# Altium PCB Gagabiro_POC_PSU.PcbDoc
Units mm, origin at the board's own origin, x right, y up, seen from the top; angles counter-clockwise.
Board outline 155 x 95 mm, 2 copper layers (Top Layer, Bottom Layer); 77 components, 30 nets, 159 pads, 0 vias.
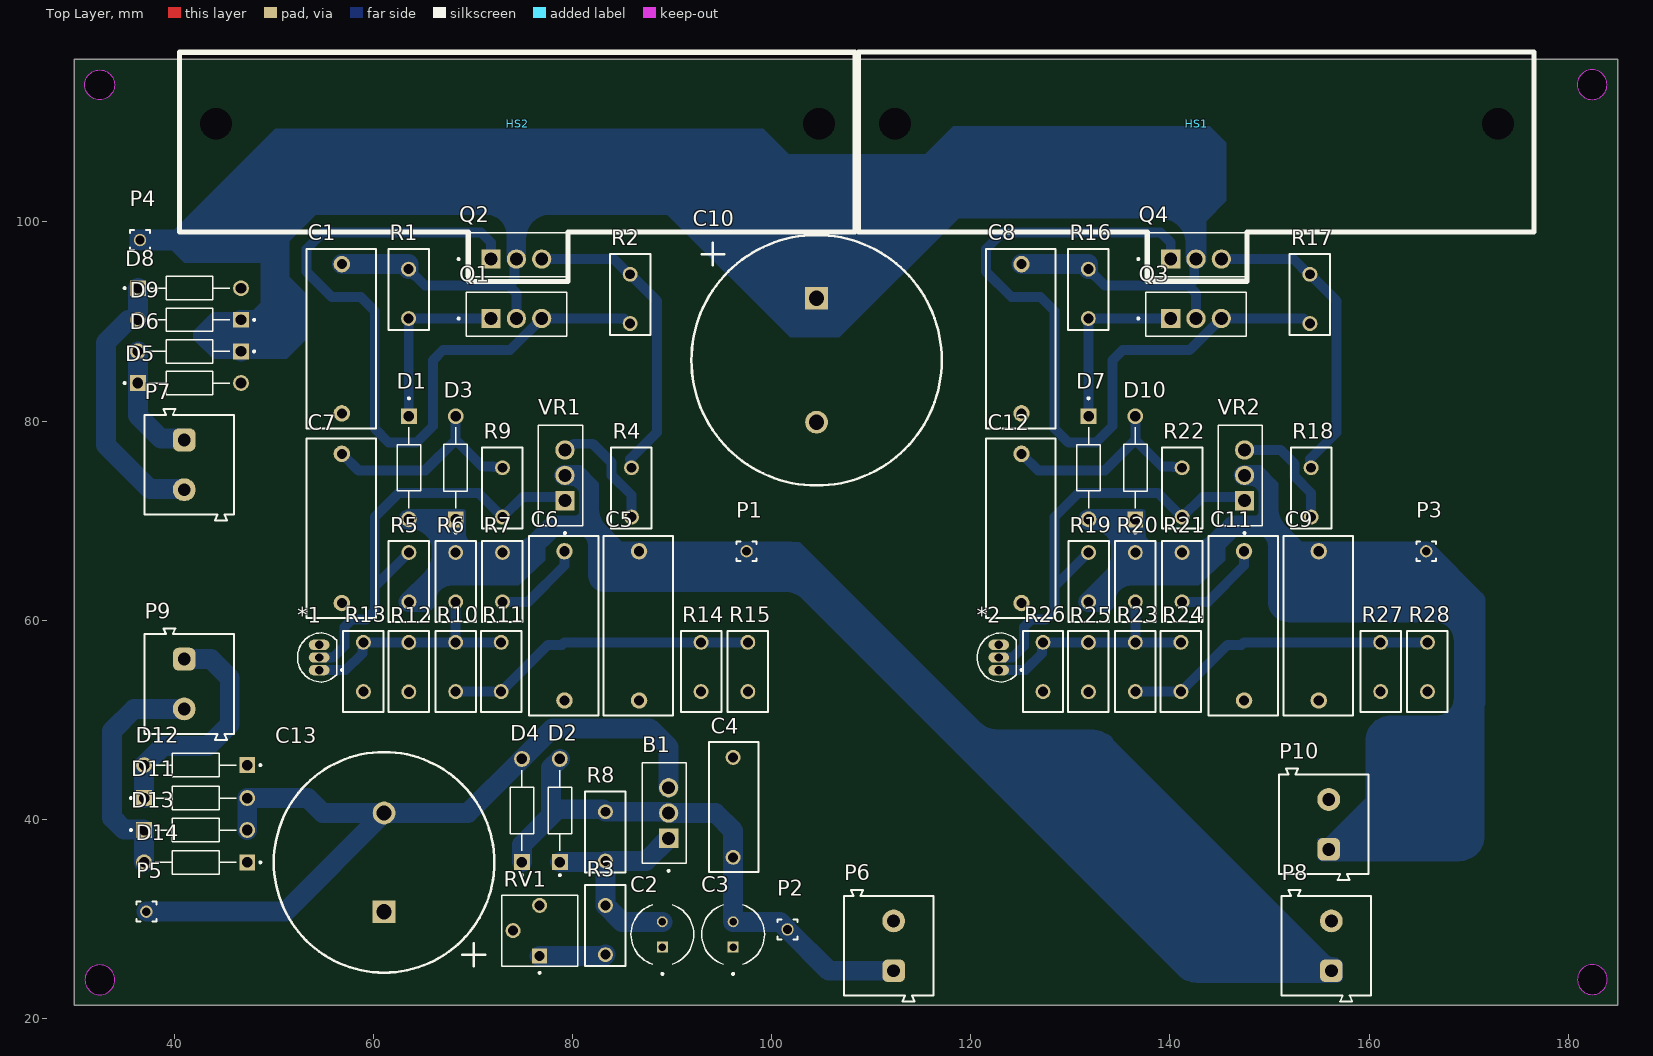
[diagram p0: Top Layer view]
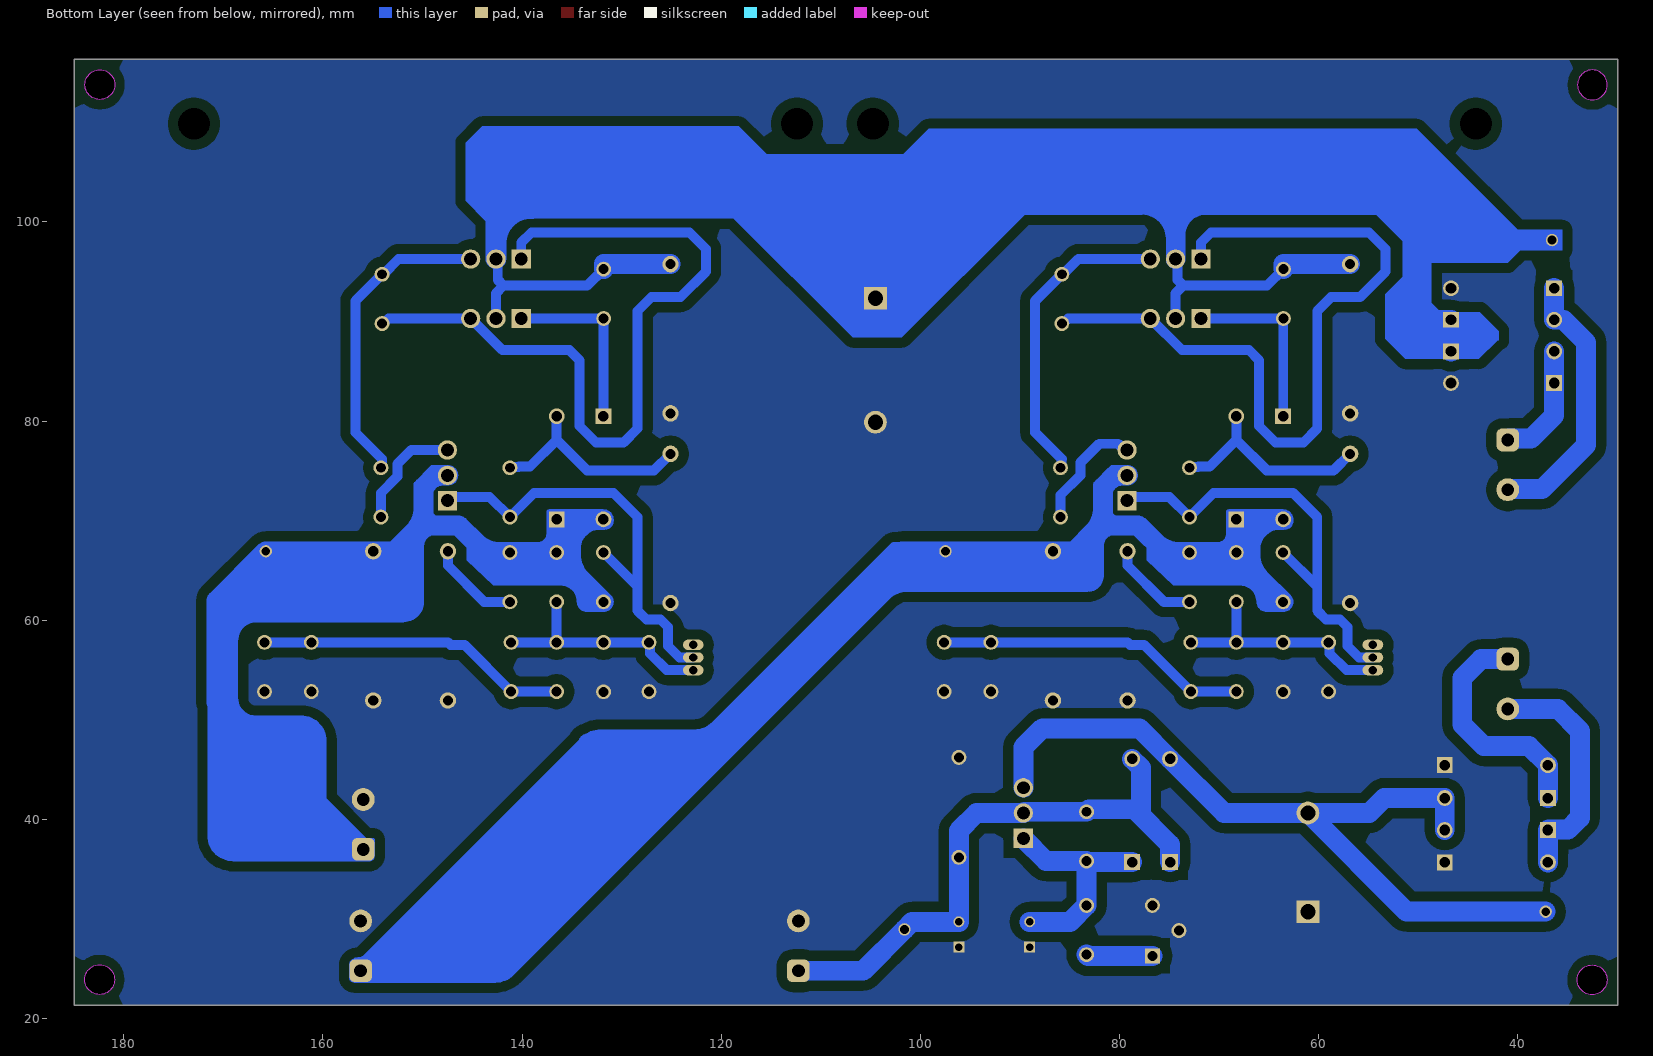
[diagram p1: Bottom Layer view, seen from below]
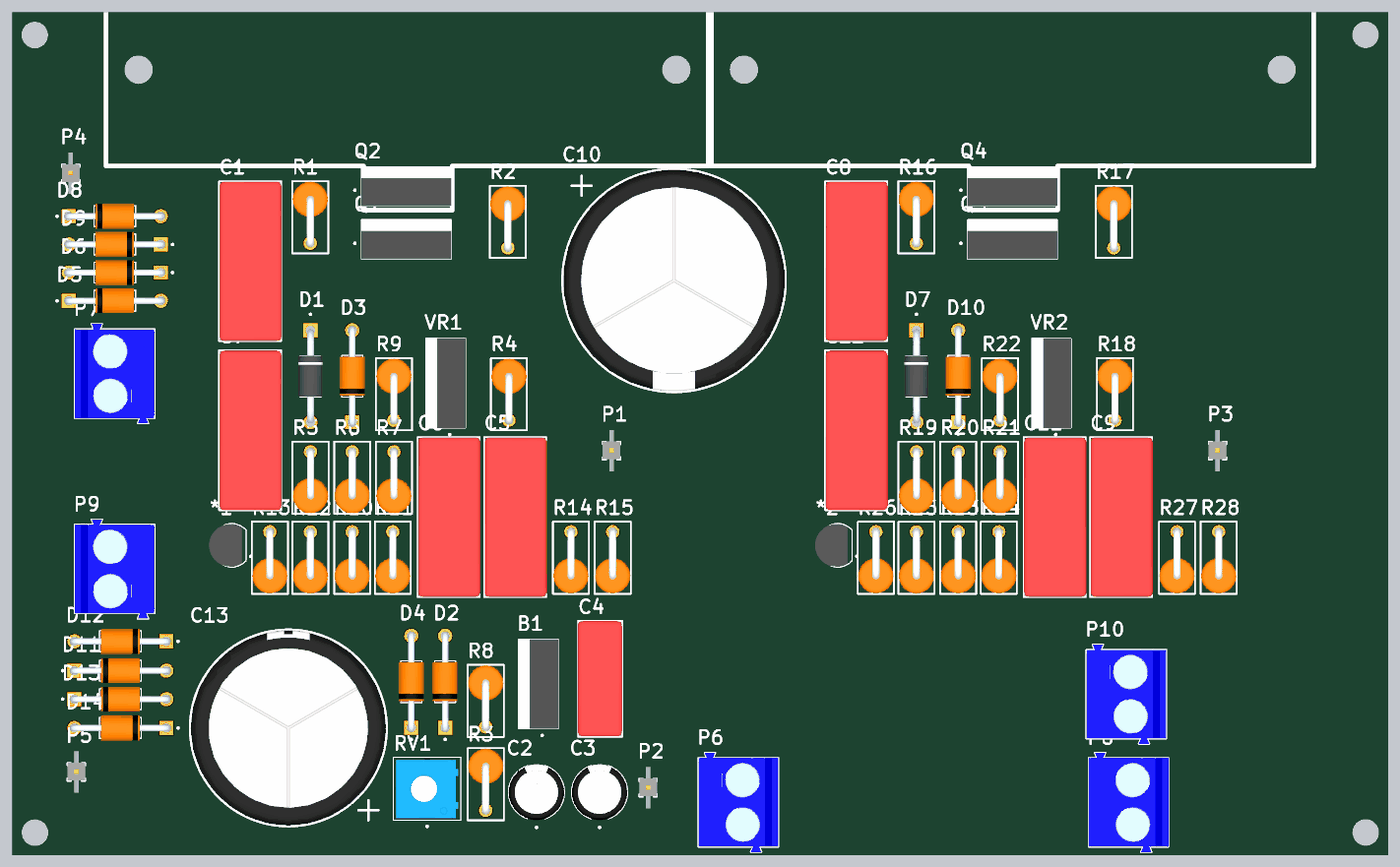
[diagram p2: 3D render of the assembled board from above, using the file's embedded part models]

## Layer stack, top to bottom
Top Solder: solder mask 0.0102, Solder Resist, Dk 3.5
Top Layer: signal copper 0.0356
Dielectric 1: dielectric 0.32, FR-4, Dk 4.8
Bottom Layer: signal copper 0.0356
Bottom Solder: solder mask 0.0102, Solder Resist, Dk 3.5

## Board outline
29.972,21.336 29.972,116.336 184.972,116.336 184.972,21.336
cut-out: 31.052,23.889 ccw(c32.552,23.889) 32.552,22.389 ccw(c32.552,23.889) 34.052,23.889 ccw(c32.552,23.889) 32.552,25.389 ccw(c32.552,23.889)
cut-out: 32.525,112.256 cw(c32.525,113.756) 31.025,113.756 cw(c32.525,113.756) 32.525,115.256 cw(c32.525,113.756) 34.025,113.756 cw(c32.525,113.756)
cut-out: 180.892,113.783 ccw(c182.392,113.783) 182.392,112.283 ccw(c182.392,113.783) 183.892,113.783 ccw(c182.392,113.783) 182.392,115.283 ccw(c182.392,113.783)
cut-out: 180.919,23.916 ccw(c182.419,23.916) 182.419,22.416 ccw(c182.419,23.916) 183.919,23.916 ccw(c182.419,23.916) 182.419,25.416 ccw(c182.419,23.916)

## Design rules (kind name [scope] priority, off if disabled: settings)
AssemblyTestPointUsage [All] p1: isadvanced=TRUE
AssemblyTestpoint [All] p1: isadvanced=TRUE testpointundercomponent=TRUE minsize=1.016 maxsize=2.54 preferedsize=1.524 minholesize=0 maxholesize=1.016 preferedholesize=0.813 testpointgrid=0.025 usegrid=TRUE gridtolerance=0 allowsidetop=TRUE allowsidebottom=TRUE
Clearance Clearance_2 [InNamedPolygon('ground_pour')] p1: isadvanced=TRUE gap=1 ignorepadtopadclearanceinfootprint=FALSE
Clearance Clearance_3 [InNet('Net*1_2') or InNet('Net*1_3') or InNet('Net*2_2') or InNet('Net*2_3')] p2: isadvanced=TRUE gap=0.076 ignorepadtopadclearanceinfootprint=FALSE
Clearance Clearance_1 [InComponent('*') vs InComponent('*')] p3: isadvanced=TRUE gap=0.025 ignorepadtopadclearanceinfootprint=FALSE
Clearance Clearance_1 [OnMid vs OnMid] p4: gap=0.254 ignorepadtopadclearanceinfootprint=FALSE sourcerule=43 cellrowname=All cellrowtype=0 cellcolname=All cellcoltype=0 innerlayers=TRUE
Clearance Clearance_2 [(ExistsOnLayer('Top Layer') Or ExistsOnLayer('Bottom Layer')) vs (ExistsOnLayer('Top Layer') Or ExistsOnLayer('Bottom Layer'))] p5: gap=0.254 ignorepadtopadclearanceinfootprint=FALSE sourcerule=43 cellrowname=All cellrowtype=0 cellcolname=All cellcoltype=0 outerlayers=TRUE
Clearance [All] p6: gap=0.254 ignorepadtopadclearanceinfootprint=FALSE ismatrix=TRUE
ComponentClearance [All] p1: isadvanced=TRUE gap=0.254 collisioncheckmode=3 verticalgap=0.254 showdistances=FALSE
FabricationTestPointUsage [All] p1: isadvanced=TRUE valid=0 allowmultiple=FALSE
FabricationTestpoint [All] p1: isadvanced=TRUE side=3 testpointundercomponent=TRUE minsize=1.016 maxsize=2.54 preferedsize=1.524 minholesize=0 maxholesize=1.016 preferedholesize=0.813 testpointgrid=0.025 allowsidetop=TRUE allowsidebottom=TRUE usegrid=TRUE gridtolerance=0
FanoutControl Fanout_BGA [IsBGA] p1: isadvanced=TRUE bgadir=Out bgaviamode=Centered fanoutstyle=Auto fanoutdirection=Alternating viagrid=0.025 // Fanout_BGA (Default Rule)
FanoutControl Fanout_LCC [IsLCC] p2: isadvanced=TRUE bgadir=Out bgaviamode=Centered fanoutstyle=Auto fanoutdirection=Alternating viagrid=0.025 // Fanout_LCC (Default Rule)
FanoutControl Fanout_SOIC [IsSOIC] p3: isadvanced=TRUE bgadir=Out bgaviamode=Centered fanoutstyle=Auto fanoutdirection=Alternating viagrid=0.025 // Fanout_SOIC (Default Rule)
FanoutControl Fanout_Small [(CompPinCount < 5)] p4: isadvanced=TRUE bgadir=Out bgaviamode=Centered fanoutstyle=Auto fanoutdirection=OutThenIn viagrid=0.025 // Fanout_Small (Default Rule)
FanoutControl Fanout_Default [All] p5: isadvanced=TRUE bgadir=Out bgaviamode=Centered fanoutstyle=Auto fanoutdirection=Alternating viagrid=0.025 // Fanout_Default (Default Rule)
Height [All] p1: isadvanced=TRUE minheight=0 maxheight=2540 prefheight=12.7
HoleSize [All] p1: isadvanced=TRUE absolutevalues=TRUE maxlimit=25.4 minlimit=0.025 maxpercent=80.000 minpercent=20.000
HoleToHoleClearance [All] p1: isadvanced=TRUE gap=0.254 allowstackedmicrovias=TRUE
LayerPairs [All] p1: isadvanced=TRUE enforce=TRUE
MinimumSolderMaskSliver [All] p1: isadvanced=TRUE minsoldermaskwidth=0.254
NetAntennae [All] p1: isadvanced=TRUE netantennaetolerance=0
PasteMaskExpansion [All] p1: isadvanced=TRUE expansion=0
PlaneClearance [All] p1: isadvanced=TRUE clearance=0.508
PlaneConnect [All] p1: isadvanced=TRUE planeconnectstyle=Relief reliefexpansion=0.508 reliefentries=4 reliefconductorwidth=0.254 reliefairgap=0.254
PolygonConnect [All] p1: connectstyle=Direct reliefconductorwidth=0.254 reliefentries=4 polygonreliefangle="90 Angle" airgapwidth=0.254
RoomDefinition maida_2 [InComponentClass('maida_2')] p1: isadvanced=TRUE confinementstyle=ConfineIn formatcopy=TRUE lockcomponents=FALSE outline 117.983,48.895 170.053,48.895 170.053,101.092 117.983,101.092
RoomDefinition maida_1 [InComponentClass('maida_1')] p2: isadvanced=TRUE confinementstyle=ConfineIn formatcopy=TRUE lockcomponents=FALSE outline 49.736,48.895 101.806,48.895 101.806,101.092 49.736,101.092
RoutingCorners [All] p1: isadvanced=TRUE cornerstyle=45-Degree minsetback=2.54 maxsetback=2.54
RoutingPriority [All] p1: isadvanced=TRUE routingpriority=0
RoutingVias [All] p1: holewidth=0.711 width=1.27 viastyle="Through Hole" minholewidth=0.711 minwidth=1.27 maxholewidth=0.711 maxwidth=1.27
ShortCircuit [All] p1: isadvanced=TRUE allowed=FALSE
SilkToSilkClearance [All] p1: isadvanced=TRUE silktosilkclearance=0.254
SilkToSolderMaskClearance [IsPad] p1: isadvanced=TRUE minsilkscreentomaskgap=0.254 clearancetoexposedcopper=TRUE
SolderMaskExpansion [All] p1: isadvanced=TRUE expansion=0.102 istentingtop=FALSE
SupplyNets "Schematic Supply Nets" [InNet('GND')] p1: isadvanced=TRUE voltage=0.000
UnRoutedNet [All] p1: isadvanced=TRUE
UnpouredPolygon [All] p1: isadvanced=TRUE
Width MaxMinWidth_1 [All] p1: isadvanced=TRUE maxlimit=2 minlimit=1 preferedwidth=1 minimp=50.000000 maximp=50.000000 favimp=50.000000
Width [All] p2: maxlimit=0.254 minlimit=0.254 preferedwidth=0.254
4 further rules are at their usual default settings.

## Classes and differential pairs
component class maida_1: *1 C1 C5 C6 C7 D1 D3 P1 Q1 Q2 R1 R2 R4 R5 R6 R7 R9 R10 R11 R12 R13 R14 R15 VR1
component class maida_2: *2 C8 C9 C11 C12 D7 D10 P3 Q3 Q4 R16 R17 R18 R19 R20 R21 R22 R23 R24 R25 R26 R27 R28

## Components (designator, comment, footprint, x,y, rotation, side; value= is the part's Value field where it differs from the comment)
*1 "LM329" TO92127P495H495-3 54.562,56.261 r270 top
*2 "LM329" TO92127P495H495-3 122.809,56.261 r270 top
B1 "LM337KVURG3" lm317 89.662,40.64 r90 top
C1 "1uF" CAP_panassonic_1u_450V 56.848,80.772 r90 top
C2 "CAP_EL_47u_stand" CAPPRD500W50D630H1120_stand 89.027,28.448 r90 top value=47uF
C3 "CAP_EL_47u_stand" CAPPRD500W50D630H1120_stand 96.139,28.448 r90 top value=47uF
C4 "100nF" CAP_panassonic_100n_450V 96.139,36.195 r90 top
C5 "1uF" CAP_panassonic_1u_450V 86.693,51.943 r90 top
C6 "1uF" CAP_panassonic_1u_450V 79.2,51.943 r90 top
C7 "1uF" CAP_panassonic_1u_450V 56.848,61.722 r90 top
C8 "1uF" CAP_panassonic_1u_450V 125.095,80.772 r90 top
C9 "1uF" CAP_panassonic_1u_450V 154.94,51.943 r90 top
C10 "CAP_EL_220u_450V" CAPPRD500W50D630H1120_stand_25x50 104.521,86.106 r270 top value=220uF
C11 "1uF" CAP_panassonic_1u_450V 147.447,51.943 r90 top
C12 "1uF" CAP_panassonic_1u_450V 125.095,61.722 r90 top
C13 "CAP_EL_2200u_stand" CAPPRD500W50D630H1120_stand_22x40 61.087,35.687 r90 top value=2200uF
D1 "1N4735A" DIOAD1036W78L463D272 63.579,75.311 r270 top
D2 "1N4001G" DIOAD1036W78L470D235 78.74,40.894 r90 top
D3 "1N4001G" DIOAD1036W78L470D235 68.278,75.311 r90 top
D4 "1N4001G" DIOAD1036W78L470D235 74.93,40.894 r90 top
D5 "1N4001G" DIOAD1036W78L470D235 41.541,83.82 r0 top
D6 "1N4001G" DIOAD1036W78L470D235 41.541,86.995 r180 top
D7 "1N4735A" DIOAD1036W78L463D272 131.826,75.311 r270 top
D8 "1N4001G" DIOAD1036W78L470D235 41.541,93.345 r0 top
D9 "1N4001G" DIOAD1036W78L470D235 41.541,90.17 r180 top
D10 "1N4001G" DIOAD1036W78L470D235 136.525,75.311 r90 top
D11 "1N4001G" DIOAD1036W78L470D235 42.164,42.145 r0 top
D12 "1N4001G" DIOAD1036W78L470D235 42.164,45.453 r180 top
D13 "1N4001G" DIOAD1036W78L470D235 42.164,38.934 r0 top
D14 "1N4001G" DIOAD1036W78L470D235 42.164,35.687 r180 top
HS1 "Heatsink" heatsink_HS_6835 108.735,99.005 r0 top
HS2 "Heatsink" heatsink_HS_6835 40.561,99.001 r0 top
P1 "1_con_header" SAMTEC_MTMM-101-X-X-S-X 97.488,66.929 r0 top
P2 "1_con_header" SAMTEC_MTMM-101-X-X-S-X 101.6,28.956 r0 top
P3 "1_con_header" SAMTEC_MTMM-101-X-X-S-X 165.735,66.929 r0 top
P4 "1_con_header" SAMTEC_MTMM-101-X-X-S-X 36.576,98.171 r0 top
P5 "1_con_header" SAMTEC_MTMM-101-X-X-S-X 37.211,30.734 r0 top
P6 "2_conn_borne" 691101710002 111.76,27.305 r90 top
P7 "2_conn_borne" 691101710002 41.521,75.605 r270 top
P8 "2_conn_borne" 691101710002 155.702,27.305 r90 top
P9 "2_conn_borne" 691101710002 41.521,53.594 r270 top
P10 "2_conn_borne" 691101710002 155.448,39.497 r90 top
Q1 "TIP50" TO254P1009X445X1985-3 74.374,90.297 r0 top
Q2 "TIP50" TO254P1009X445X1985-3 74.374,96.266 r0 top
Q3 "TIP50" TO254P1009X445X1985-3 142.621,90.297 r0 top
Q4 "TIP50" TO254P1009X445X1985-3 142.621,96.266 r0 top
R1 "100K" RES_2W_vertical 63.555,95.25 r270 top
R2 "1k" RES_2W_vertical 85.804,94.742 r270 top
R3 "1K5" RES_2W_vertical 83.312,31.369 r270 top
R4 "10R" RES_2W_vertical 85.931,75.311 r270 top
R5 "1K5" RES_2W_vertical 63.579,61.849 r90 top
R6 "1k" RES_2W_vertical 68.278,61.849 r90 top
R7 "2R7" RES_2W_vertical 72.977,61.849 r90 top
R8 "150R" RES_2W_vertical 83.312,40.767 r270 top
R9 "100R" RES_2W_vertical 72.977,75.311 r270 top
R10 "36K" RES_2W_vertical 68.278,52.832 r90 top
R11 "36K" RES_2W_vertical 72.85,52.832 r90 top
R12 "NC" RES_2W_vertical 63.571,52.816 r90 top
R13 "NC" RES_2W_vertical 59.007,52.832 r90 top
R14 "36K" RES_2W_vertical 92.916,52.832 r90 top
R15 "36K" RES_2W_vertical 97.615,52.832 r90 top
R16 "100K" RES_2W_vertical 131.802,95.25 r270 top
R17 "1k" RES_2W_vertical 154.051,94.742 r270 top
R18 "10R" RES_2W_vertical 154.178,75.311 r270 top
R19 "1K5" RES_2W_vertical 131.826,61.849 r90 top
R20 "1k" RES_2W_vertical 136.525,61.849 r90 top
R21 "2R7" RES_2W_vertical 141.224,61.849 r90 top
R22 "100R" RES_2W_vertical 141.224,75.311 r270 top
R23 "36K" RES_2W_vertical 136.525,52.832 r90 top
R24 "36K" RES_2W_vertical 141.097,52.832 r90 top
R25 "NC" RES_2W_vertical 131.818,52.816 r90 top
R26 "NC" RES_2W_vertical 127.254,52.832 r90 top
R27 "36K" RES_2W_vertical 161.163,52.832 r90 top
R28 "36K" RES_2W_vertical 165.862,52.832 r90 top
RV1 "TRIMMER_100R" "TRIM_PV36W204C01B00 - duplicate" 76.581,28.829 r90 top value=100R
VR1 "LM317" TO254P1009X445X1985-3 79.248,74.549 r90 top
VR2 "LM317" TO254P1009X445X1985-3 147.495,74.549 r90 top

## Footprints (in the part's own frame and the unit in brackets; to place one, negate y for a bottom-side part, rotate by r counter-clockwise, add the part's x,y. Pads: shape width x height; smd on the part's side, far side on the other; paste and mask are expansions set on the pad)
691101710002 [mm] "5,00mm - modular - blue - Horizontal entry with pressure clamp - 12,6mm height - 02p"
  rrect50% 2.286x2.286 hole 1.3: 1(-2.5,-0.5)
  round 2.286 hole 1.3: 2(2.5,-0.5)
  silkscreen extent -5.6,-4.5 5.6,4.5, body extent -5.6,-4.5 5.6,4.5, height 12.65
CAP_panassonic_1u_450V [mil]
  round 65 hole 40: 1(0,0) 2(590,0)
  silkscreen extent -59,-135 650,140, body extent -59,-138 649,138, height 551
CAP_panassonic_100n_450V [mm]
  round 1.5 hole 1: 1(0,0) 2(10.033,0)
  silkscreen extent -1.49,-2.54 11.56,2.41, body extent -1.44,-2.54 11.56,2.46, height 11
CAPPRD500W50D630H1120_stand [mm]
  round 1.1 hole 0.75: N(1.27,0)
  rect 1.1x1.1 hole 0.75: P(-1.27,0)
  silkscreen extent -4.06,-3.15 3,3.15, body extent -3.15,-3.14 3.15,3.14, height 12
CAPPRD500W50D630H1120_stand_22x40 [mil]
  round 90 hole 60: N(195,0)
  rect 90x90 hole 60: P(-195,0)
  silkscreen extent -436,-436 436,436, body extent -432,-433 433,433, height 1594
CAPPRD500W50D630H1120_stand_25x50 [mil]
  round 90 hole 60: N(245,0)
  rect 90x90 hole 60: P(-245,0)
  silkscreen extent -495,-495 495,495, body extent -492,-492 492,492, height 1990
DIOAD1036W78L463D272 [mm]
  rect 1.59x1.59 / inner round 1.59 / far side rect 1.59x1.59 hole 1.06: 1(-5.18,0)
  round 1.59 hole 1.06: 2(5.18,0)
  silkscreen extent -7.07,-1.19 4.07,1.19, body extent -5.29,-1.36 5.29,1.36, height 2.72
DIOAD1036W78L470D235 [mm]
  round 1.59 hole 1.06: A(5.18,0)
  rect 1.59x1.59 hole 1.06: C(-5.18,0)
  silkscreen extent -6.6,-1.17 4.07,1.17, body extent -5.65,-1.4 5.65,1.4, height 2.8
heatsink_HS_6835 [mm]
  round 0 hole 3.2 unplated: ""(3.66,10.85) ""(64.214,10.854)
  silkscreen extent 0,-4.97 67.82,18.03, body extent 0.09,0.19 67.77,34.63, height 40
lm317 [mm]
  rect 1.935x1.935 / inner round 1.935 / far side rect 1.935x1.935 hole 1.29: 1(-2.54,0)
  round 1.935 hole 1.29: 2(2.54,0) 3(0,0)
  silkscreen extent -5.9,-1.79 5.05,2.66, body extent -5.05,-1.79 5.05,2.65, height 19.84
RES_2W_vertical [mm]
  round 1.5 hole 1: 1(0,0) 2(4.953,0)
  silkscreen extent -2.03,-2.03 6.1,2.03, body extent -2,-2 5.35,2, height 13.73
SAMTEC_MTMM-101-X-X-S-X [mm]
  round 1.24 hole 0.89: 1(0,0)
  silkscreen extent -1,-1 1,1, body extent -1,-0.97 1,1.03, height 7.21
TO254P1009X445X1985-3 [mm]
  rect 1.935x1.935 / inner round 1.935 / far side rect 1.935x1.935 hole 1.29: 1(-2.54,0)
  round 1.935 hole 1.29: 2(0,0) 3(2.54,0)
  silkscreen extent -5.9,-1.79 5.05,2.66, body extent -5.05,-1.79 5.05,2.65, height 19.84
TO92127P495H495-3 [mm]
  oval 1.04x2.08 hole 0.84: 1(-1.27,0) 2(0,0) 3(1.27,0)
  silkscreen extent -2.48,-2.16 2.48,2.4, body extent -2.41,-2.41 2.41,1.29, height 5.96
"TRIM_PV36W204C01B00 - duplicate" [mm]
  rect 1.508x1.508 / inner round 1.508 / far side rect 1.508x1.508 hole 1: 1(-2.54,-0.127)
  round 1.508 hole 1: 2(0,2.54) 3(2.54,-0.127)
  silkscreen extent -4.33,-3.94 3.56,3.68, body extent -3.3,-3.62 3.3,3.37, height 4.88

## Part data
B1: library part LM337, "3 Pin 1.5A Adjustable Negative Voltage Regulator", Manufacturer_Name="Texas Instruments", Mouser Part Number=595-LM337KVURG3, Datasheet Link=http://www.ti.com/lit/gpn/lm337, Geometry.Height=2.65mm, Manufacturer_Part_Number=LM337KVURG3, Mouser Price/Stock=https://www.mouser.co.uk/ProductDetail/Texas-Instruments/LM337KVURG3?qs=iSMark9AYDXYOGB3Dr0rVg%3D%3D
C1 C5 C6 C7 C8 C9 C11 C12: library part CAP_POLY_1u, "Capacitor, Silver Mica", Part Number=CMICA_47PF
C2 C3 C10 C13: "220F 16V Aluminum Electrolytic Capacitors Radial, Can 1000 Hrs @ 105C", Package="RADIAL-2 Panasonic", Availability="In Stock", Check_prices=https://www.snapeda.com/parts/EEU-HD1C221B/Panasonic/view-part/?ref=eda, MF=Panasonic, MP=EEU-HD1C221B, Price=None, Purchase-URL=https://pricing.snapeda.com/search/part/EEU-HD1C221B/?ref=eda, SnapEDA_Link=https://www.snapeda.com/parts/EEU-HD1C221B/Panasonic/view-part/?ref=snap
C4: library part CAP_POLY_100n, "Capacitor, Silver Mica", Part Number=CMICA_47PF
D1 D7: "Zener Diode 6.2V 1W Â±5% Through Hole DO-204AL (DO-41)", Package="DO-41 ON Semiconductor", Check_prices=https://www.snapeda.com/parts/1N4735A/Onsemi/view-part/?ref=eda, MF="ON Semiconductor", MP=1N4735A, SnapEDA_Link=https://www.snapeda.com/parts/1N4735A/Onsemi/view-part/?ref=snap
D2 D3 D4 D5 D6 D8 D9 D10 D11 D12 D13 D14: "1A, 50V, Standard Recovery Rectifier", Package="DO-41-2 Taiwan Semiconductor", Availability="In Stock", Check_prices=https://www.snapeda.com/parts/1N4001G/Taiwan+Semiconductor/view-part/?ref=eda, MF="Taiwan Semiconductor", MP=1N4001G, Price=None, Purchase-URL=https://pricing.snapeda.com/search/part/1N4001G/?ref=eda, SnapEDA_Link=https://www.snapeda.com/parts/1N4001G/Taiwan+Semiconductor/view-part/?ref=snap
HS1 HS2: library part "HS 6835"
P1 P2 P3 P4 P5 P6 P7 P8 P9 P10: "Connector Header Surface Mount, Right Angle 2 position 0.079 (2.00mm)", Package=None, Availability="In Stock", Check_prices=https://www.snapeda.com/parts/S2B-PH-SM4-TB/JST+Sales+America+Inc./view-part/?ref=eda, MF="JST Sales", MP=S2B-PH-SM4-TB, Price=None, Purchase-URL=https://pricing.snapeda.com/search/part/S2B-PH-SM4-TB/?ref=eda, SnapEDA_Link=https://www.snapeda.com/parts/S2B-PH-SM4-TB/JST+Sales+America+Inc./view-part/?ref=snap
Q1 Q2 Q3 Q4: "Bipolar (BJT) Transistor NPN 400 V 1 A 10MHz 2 W Through Hole TO-220-3", Package="TO-220-3 onsemi", Availability="In Stock", Check_prices=https://www.snapeda.com/parts/TIP50/Onsemi/view-part/?ref=eda, MF="ON Semiconductor", MP=TIP50, Price=None, Purchase-URL=https://pricing.snapeda.com/search/part/TIP50/?ref=eda, SnapEDA_Link=https://www.snapeda.com/parts/TIP50/Onsemi/view-part/?ref=snap
R1 R16: library part R_2W_vertical_100K, "Resistor, 2W", Part Number=R2W, Author=colombari, ComponentLink1Description=Datasheet, ComponentLink1URL=N.A., ComponentLink2Description="Supplier link", ComponentLink2URL=N.A.
R2 R6 R17 R20: library part R_2W_vertical_1k, "Resistor, 2W", Part Number=R2W, Author=colombari, ComponentLink1Description=Datasheet, ComponentLink1URL=N.A., ComponentLink2Description="Supplier link", ComponentLink2URL=N.A.
R3 R5 R19: library part R_2W_vertical_1K5, "Resistor, 2W", Part Number=R2W, Author=colombari, ComponentLink1Description=Datasheet, ComponentLink1URL=N.A., ComponentLink2Description="Supplier link", ComponentLink2URL=N.A.
R4 R18: library part R_2W_vertical_10R, "Resistor, 2W", Part Number=R2W, Author=colombari, ComponentLink1Description=Datasheet, ComponentLink1URL=N.A., ComponentLink2Description="Supplier link", ComponentLink2URL=N.A.
R7 R21: library part R_2W_vertical_2R7, "Resistor, 2W", Part Number=R2W, Author=colombari, ComponentLink1Description=Datasheet, ComponentLink1URL=N.A., ComponentLink2Description="Supplier link", ComponentLink2URL=N.A.
R8: library part R_2W_vertical_150R, "Resistor, 2W", Part Number=R2W, Author=colombari, ComponentLink1Description=Datasheet, ComponentLink1URL=N.A., ComponentLink2Description="Supplier link", ComponentLink2URL=N.A.
R9 R22: library part R_2W_vertical_100R, "Resistor, 2W", Part Number=R2W, Author=colombari, ComponentLink1Description=Datasheet, ComponentLink1URL=N.A., ComponentLink2Description="Supplier link", ComponentLink2URL=N.A.
R10 R11 R14 R15 R23 R24 R27 R28: library part R_2W_vertical_36K, "Resistor, 2W", Part Number=R2W, Author=colombari, ComponentLink1Description=Datasheet, ComponentLink1URL=N.A., ComponentLink2Description="Supplier link", ComponentLink2URL=N.A.
R12 R13 R25 R26: library part R_2W_vertical_NC, "Resistor, 2W", Part Number=R2W, Author=colombari, ComponentLink1Description=Datasheet, ComponentLink1URL=N.A., ComponentLink2Description="Supplier link", ComponentLink2URL=N.A.
RV1: "TRIMMER", Package=None, Check_prices=https://www.snapeda.com/parts/PV36W204C01B00./Bourns/view-part/?ref=eda, MF="Bourns Electronics", MP=PV36W204C01B00., SnapEDA_Link=https://www.snapeda.com/parts/PV36W204C01B00./Bourns/view-part/?ref=snap
VR1 VR2: Package=None, Availability=Unavailable, MP=LM317AMDT/NOPB, Price=None

## Nets (pads, with @x,y where several pads share a name; then routed paths per layer and width w, separated by ;. In a path a pad name is that pad's centre, name@x,y a point inside that pad or via, vN(x,y) a via of type N, cw(c..) or ccw(c..) an arc to the next point about the centre after c; other vN are vias at no path point)
GND: C1.1 C2.P C3.P C4.2 C5.1 C6.1 C7.1 C8.1 C9.1 C10.N C11.1 C12.1 C13.P D5.A D8.A D12.C D14.C P6.2 P8.2 P10.2 R12.1 R13.1 R14.1 R15.1 R25.1 R26.1 R27.1 R28.1 RV1.2 RV1.3
MAIDA_GRID_IN: B1.2 C13.N D4.A D11.A D13.A P5.1 | length 82.5
  Bottom Layer w2: P5.1 51.181,30.734 C13.N ; D13.A D11.A 53.425,42.145 54.929,40.64 C13.N ; B1.2 89.662,47.244 87.757,49.149 78.005,49.149 D4.A 69.496,40.64 C13.N
MAIDA_IN: C1.2 C8.2 C10.P D6.C D9.C P4.1 Q1.2 Q2.2 Q3.2 Q4.2 R1.1 R16.1 | length 154.2
  Bottom Layer w1: R1.1 65.206,93.599 73.609,93.599 ; Q1.2 74.374,92.834 73.609,93.599 ; Q2.2 74.195,96.087 74.195,94.185 73.609,93.599 ; 100.584,100.838 103.95,97.472 ; C10.P 104.394,92.456 104.394,97.028 103.95,97.472 ; R16.1 133.453,93.599 141.856,93.599 ; 140.081,100.838 107.315,100.838 103.95,97.472 ; Q3.2 142.621,92.834 141.856,93.599 ; Q4.2 142.442,96.087 142.442,94.185 141.856,93.599
  Bottom Layer w2: P4.1 48.133,98.171 ; D6.C D9.C 48.387,90.17 49.657,91.44 49.657,96.647 48.133,98.171 ; C1.2 63.555,95.758 R1.1 ; 77.676,102.108 52.07,102.108 48.133,98.171 ; C8.2 131.802,95.758 R16.1 ; 142.621,101.981 143.129,102.489
Net*1_2: *1.2 R5.2 R9.2 VR1.1 | length 45
  Bottom Layer w1: *1.2 55.959,56.261 57.102,57.404 57.102,59.309 57.864,60.071 59.261,60.071 60.15,60.96 60.15,63.373 ; R5.2 60.15,63.373 ; VR1.1 78.867,72.39 75.009,72.39 R9.2 70.564,72.771 62.563,72.771 60.15,70.358 60.15,63.373
Net*1_3: *1.3 R6.1 R10.2 R11.2 R12.2 R13.2 | length 24.1
  Bottom Layer w1: *1.3 57.229,54.991 58.911,56.673 58.911,57.689 R13.2 59.015,57.777 R12.2@63.563,57.777 ; R6.1@68.286,61.841 R6.1 R10.2 ; R11.2 R10.2 ; R12.2@63.563,57.777 R12.2 ; R12.2@63.563,57.777 R12.2 ; R12.2 63.579,57.777 68.27,57.777 R10.2
Net*2_2: *2.2 R19.2 R22.2 VR2.1 | length 45
  Bottom Layer w1: *2.2 124.206,56.261 125.349,57.404 125.349,59.309 126.111,60.071 127.508,60.071 128.397,60.96 128.397,63.373 ; R19.2 128.397,63.373 ; VR2.1 147.114,72.39 143.256,72.39 R22.2 138.811,72.771 130.81,72.771 128.397,70.358 128.397,63.373
Net*2_3: *2.3 R20.1 R23.2 R24.2 R25.2 R26.2 | length 24.1
  Bottom Layer w1: *2.3 125.476,54.991 127.158,56.673 127.158,57.689 R26.2 127.262,57.777 R25.2@131.81,57.777 ; R20.1@136.533,61.841 R20.1 R23.2 ; R24.2 R23.2 ; R25.2@131.81,57.777 R25.2 ; R25.2@131.81,57.777 R25.2 ; R25.2 131.826,57.777 136.517,57.777 R23.2
NetB1_1: B1.1 C2.N D2.C R3.1 R8.2 | length 22.8
  Bottom Layer w2: D2.C 83.212,35.714 R8.2 ; C2.N 84.963,29.718 R3.1 R8.2 ; B1.1 87.376,35.814 R8.2
NetC6_2: C6.2 R7.1 | length 9.2
  Bottom Layer w1: R7.1 75.565,61.849 79.2,65.484 C6.2
NetC7_2: C7.2 D3.A R9.1 | length 21.6
  Bottom Layer w1: C7.2 58.499,75.057 65.23,75.057 68.278,78.105 ; D3.A 68.278,78.105 ; R9.1 72.881,75.407 72.119,75.407 72.088,75.438 70.945,75.438 68.278,78.105
NetC11_2: C11.2 R21.1 | length 9.2
  Bottom Layer w1: R21.1 143.812,61.849 147.447,65.484 C11.2
NetC12_2: C12.2 D10.A R22.1 | length 21.6
  Bottom Layer w1: C12.2 126.746,75.057 133.477,75.057 136.525,78.105 ; D10.A 136.525,78.105 ; R22.1 141.128,75.407 140.366,75.407 140.335,75.438 139.192,75.438 136.525,78.105
NetD1_1: D1.1 Q1.1 R1.2 | length 18.1
  Bottom Layer w1: D1.1 63.567,80.503 63.567,90.285 R1.2 Q1.1
NetD7_1: D7.1 Q3.1 R16.2 | length 18.1
  Bottom Layer w1: D7.1 131.814,80.503 131.814,90.285 R16.2 Q3.1
NetQ1_3: Q1.3 Q2.1 R2.2 | length 79.4
  Bottom Layer w1: Q2.1 71.834,97.917 70.818,98.933 54.943,98.933 53.292,97.282 53.292,94.996 55.832,92.456 58.753,92.456 60.15,91.059 60.15,79.248 61.547,77.851 64.341,77.851 65.992,79.502 65.992,86.106 67.008,87.122 73.739,87.122 Q1.3 85.16,90.297 85.668,89.789 R2.2
NetQ2_3: Q2.3 R2.1 R4.1 | length 31.2
  Bottom Layer w1: Q2.3 84.146,96.266 85.67,94.742 R2.1 88.471,92.075 88.471,78.867 85.804,76.2 85.835,76.169 85.835,75.407 R4.1
NetQ3_3: Q3.3 Q4.1 R17.2 | length 79.4
  Bottom Layer w1: Q4.1 140.081,97.917 139.065,98.933 123.19,98.933 121.539,97.282 121.539,94.996 124.079,92.456 127,92.456 128.397,91.059 128.397,79.248 129.794,77.851 132.588,77.851 134.239,79.502 134.239,86.106 135.255,87.122 141.986,87.122 Q3.3 153.408,90.297 153.916,89.789 R17.2
NetQ4_3: Q4.3 R17.1 R18.1 | length 31.2
  Bottom Layer w1: Q4.3 152.393,96.266 153.917,94.742 R17.1 156.718,92.075 156.718,78.867 154.051,76.2 154.082,76.169 154.082,75.407 R18.1
NetR3_2: R3.2 RV1.1 | length 6.7
  Bottom Layer w2: RV1.1 83.185,26.289 R3.2
NetR4_2: R4.2 VR1.3 | length 12
  Bottom Layer w1: VR1.3 79.501,77.089 80.136,77.724 82.042,77.724 83.947,75.819 83.947,74.549 85.931,72.565 R4.2
NetR10_1: R10.1 R11.1 R14.2 R15.2 | length 31.4
  Bottom Layer w1: R10.1 R11.1 77.549,57.531 78.946,57.531 79.2,57.785 R15.2
NetR18_2: R18.2 VR2.3 | length 11.6
  Bottom Layer w1: VR2.3 151.13,77.089 152.527,75.692 152.527,74.422 154.178,72.771 R18.2
NetR23_1: R23.1 R24.1 R27.2 R28.2 | length 31.4
  Bottom Layer w1: R23.1 R24.1 145.796,57.531 147.193,57.531 147.447,57.785 R28.2
TF_B+: D5.C D6.A P7.1 | length 12.1
  Bottom Layer w2: D6.A D5.C 36.361,80.557 38.669,78.248 40.878,78.248 P7.1
TF_B-: D8.C D9.A P7.2 | length 27.4
  Bottom Layer w2: D8.C D9.A 35.433,90.17 33.147,87.884 33.147,77.597 37.584,73.16 40.966,73.16 P7.2
TF_G+: D11.C D12.A P9.1 | length 23.6
  Bottom Layer w2: D11.C D12.A 38.902,47.371 43.434,47.371 45.593,49.53 45.593,54.189 43.688,56.094 P9.1
TF_G-: D13.C D14.A P9.2 | length 23.8
  Bottom Layer w2: D14.A D13.C 36.929,38.989 34.954,38.989 33.782,40.161 33.782,48.895 35.981,51.094 P9.2
VAA1: C5.2 D1.2 D3.C P1.1 P8.1 R5.1 R6.2 R7.2 VR1.2 | length 97
  Bottom Layer w2: D1.2@63.555,70.107 D1.2 D3.C R6.2 ; R5.1 68.278,66.548 R6.2 ; VR1.2 80.489,74.549 81.661,73.377 81.661,69.499 ; 133.382,47.625 121.158,47.625 101.854,66.929 P1.1 C5.2 84.231,66.929 81.661,69.499 ; R6.2 R7.2 75.449,66.802 78.146,69.499 81.661,69.499
VAA2: C9.2 D7.2 D10.C P3.1 P10.1 R19.1 R20.2 R21.2 VR2.2 | length 91.2
  Bottom Layer w2: D7.2@131.802,70.107 D7.2 D10.C R20.2 ; R19.1 136.525,66.548 R20.2 ; VR2.2 148.737,74.549 149.908,73.377 149.908,69.499 ; P10.1 170.688,51.737 170.688,61.976 P3.1 C9.2 152.478,66.929 149.908,69.499 ; R20.2 R21.2 143.696,66.802 146.393,69.499 149.908,69.499
VGG: B1.3 C3.N C4.1 D2.A D4.C P2.1 P6.1 R8.1 | length 58.7
  Bottom Layer w2: D4.C 74.93,37.465 78.486,41.021 83.058,41.021 R8.1 89.535,40.767 B1.3 94.361,40.64 96.139,38.862 C4.1 C3.N 100.838,29.718 P2.1 105.751,24.805 P6.1 ; 77.851,40.386 77.851,45.185 D2.A
pads on no net: *1.1 *2.1 HS1. HS2.

## Polygon pours and split planes (outlines as drawn)
GND on Bottom Layer "ground_pour" (solid, remove dead copper, pour order 0): 29.972,21.336 29.972,116.336 184.972,116.336 184.972,21.336

## Other copper
Bottom Layer:
  region net VAA1: 157.205,23.772 157.276,23.842 ccw(c157.089,24.029) 157.353,24.029 157.353,25.4 ccw(c156.718,25.4) 157.165,25.851 ccw(c156.479,25.161) 156.479,26.134 156.238,26.134 156.033,26.244 cw(c156.718,27.261) 155.851,26.394 133.967,48.278 ccw(c132.171,46.482) 132.171,49.022 122.718,49.022 cw(c122.718,51.562) 120.922,49.766 102.997,67.691 ccw(c102.69,67.384) 102.69,67.818 97.742,67.818 84.915,67.945 83.373,69.487 cw(c85.169,71.283) 82.629,71.283 82.629,73.66 ccw(c82.323,73.66) 82.539,73.877 80.851,75.565 79.2,75.565 ccw(c79.2,74.549) 79.2,73.533 79.708,73.533 cw(c79.708,72.517) 80.724,72.517 80.724,70.993 cw(c80.216,70.993) 80.216,70.485 78.215,70.485 ccw(c78.214,69.185) 77.295,70.104 75.753,68.562 cw(c73.957,70.357) 73.957,67.818 70.183,67.818 cw(c70.183,68.707) 69.294,68.707 69.294,70.866 ccw(c69.04,70.866) 69.04,71.12 63.579,71.12 ccw(c63.579,70.104) 62.563,70.104 62.563,69.977 ccw(c63.452,69.977) 63.452,69.088 63.96,69.088 cw(c63.96,67.183) 65.865,67.183 65.865,66.584 cw(c63.326,66.584) 65.121,64.788 62.832,62.499 ccw(c63.482,61.849) 62.563,61.849 ccw(c63.579,61.849) 63.579,60.833 65.23,60.833 ccw(c65.23,61.849) 66.246,61.849 cw(c67.897,61.849) 67.897,63.5 74.628,63.5 77.295,66.04 77.295,67.183 cw(c78.692,67.183) 78.692,68.58 80.47,68.58 cw(c80.47,67.437) 81.613,67.437 81.613,64.389 81.614,64.389 ccw(c83.185,64.437) 83.185,62.865 101.31,62.865 cw(c101.31,60.325) 103.106,62.121 119.144,46.083 ccw(c120.94,47.879) 119.144,46.083 140.861,24.366 ccw(c142.657,26.162) 142.657,23.622 156.845,23.622 ccw(c156.845,24.13)
  region net VAA2: 130.81,61.849 ccw(c131.826,61.849) 131.826,60.833 133.477,60.833 ccw(c133.477,61.849) 134.493,61.849 cw(c136.144,61.849) 136.144,63.5 142.875,63.5 145.542,66.04 145.542,67.183 cw(c146.939,67.183) 146.939,68.58 148.717,68.58 cw(c148.717,67.437) 149.86,67.437 149.86,61.849 ccw(c151.892,61.849) 151.892,59.817 166.624,59.817 cw(c166.624,57.912) 168.529,57.912 168.529,52.197 cw(c166.751,52.197) 166.751,50.419 162.179,50.419 ccw(c162.179,47.879) 159.639,47.879 159.639,40.64 cw(c157.099,40.64) 157.099,38.1 154.94,38.1 ccw(c154.94,37.973) 154.813,37.973 154.813,36.322 ccw(c155.321,36.322) 155.321,35.814 169.037,35.814 ccw(c169.037,38.354) 171.577,38.354 171.577,62.357 165.989,67.818 153.162,67.945 151.62,69.487 cw(c153.416,71.283) 150.876,71.283 150.876,73.66 ccw(c150.569,73.66) 150.786,73.877 149.098,75.565 147.447,75.565 ccw(c147.447,74.549) 146.431,74.549 ccw(c147.447,74.549) 147.447,73.533 147.955,73.533 cw(c147.955,72.517) 148.971,72.517 148.971,70.993 cw(c148.463,70.993) 148.463,70.485 146.462,70.485 ccw(c146.462,69.184) 145.542,70.104 144,68.562 cw(c142.204,70.358) 142.204,67.818 138.43,67.818 cw(c138.43,68.707) 137.541,68.707 137.541,70.866 ccw(c137.287,70.866) 137.287,71.12 131.826,71.12 ccw(c131.826,70.104) 130.81,70.104 130.81,69.977 ccw(c131.699,69.977) 131.699,69.088 132.207,69.088 cw(c132.207,67.183) 134.112,67.183 134.112,66.584 cw(c131.572,66.584) 133.368,64.788 131.079,62.499 ccw(c131.73,61.849)
  region net MAIDA_IN: 73.406,96.266 ccw(c74.36,96.266) 74.36,95.312 74.423,95.312 ccw(c74.423,96.226) 75.336,96.226 75.336,98.323 cw(c77.724,98.323) 77.724,100.711 89.535,100.711 101.854,88.392 106.807,88.392 118.872,100.457 138.811,100.457 138.811,100.33 139.065,100.33 cw(c139.065,97.79) 141.605,97.79 141.605,96.266 ccw(c142.571,96.266) 142.571,95.3 142.671,95.3 ccw(c142.671,96.266) 143.637,96.266 143.637,100.076 145.669,102.108 145.669,107.95 144.018,109.601 118.237,109.601 115.443,106.807 101.727,106.807 99.187,109.347 50.165,109.347 40.005,99.187 35.56,99.187 35.56,97.155 39.751,97.155 41.021,95.885 48.895,95.885 49.911,94.869 49.911,91.567 49.276,90.932 43.815,90.932 41.91,89.027 41.91,88.138 42.037,88.138 43.942,86.233 51.308,86.233 53.34,88.265 53.34,92.71 51.562,94.488 51.562,98.044 54.229,100.711 71.374,100.711 cw(c71.374,98.679) 73.406,98.679

## Silkscreen, mask and mechanical layers (free items; w line width, h text height)
Mechanical 1:
  circle w0.254: c182.419,23.916 r1.5
  circle w0.254: c182.392,113.783 r1.5
  circle w0.254: c32.525,113.756 r1.5
  circle w0.254: c32.552,23.889 r1.5
  lines w0.254: 29.972,21.336 184.972,21.336 184.972,116.336 29.972,116.336 29.972,21.336